# Altium PCB 100x100.PcbDoc
Units mm, origin at the board's own origin, x right, y up, seen from the top; angles counter-clockwise.
Board outline 100 x 100 mm, 2 copper layers (Top Layer, Bottom Layer); 65 components, 37 nets, 201 pads, 79 vias.
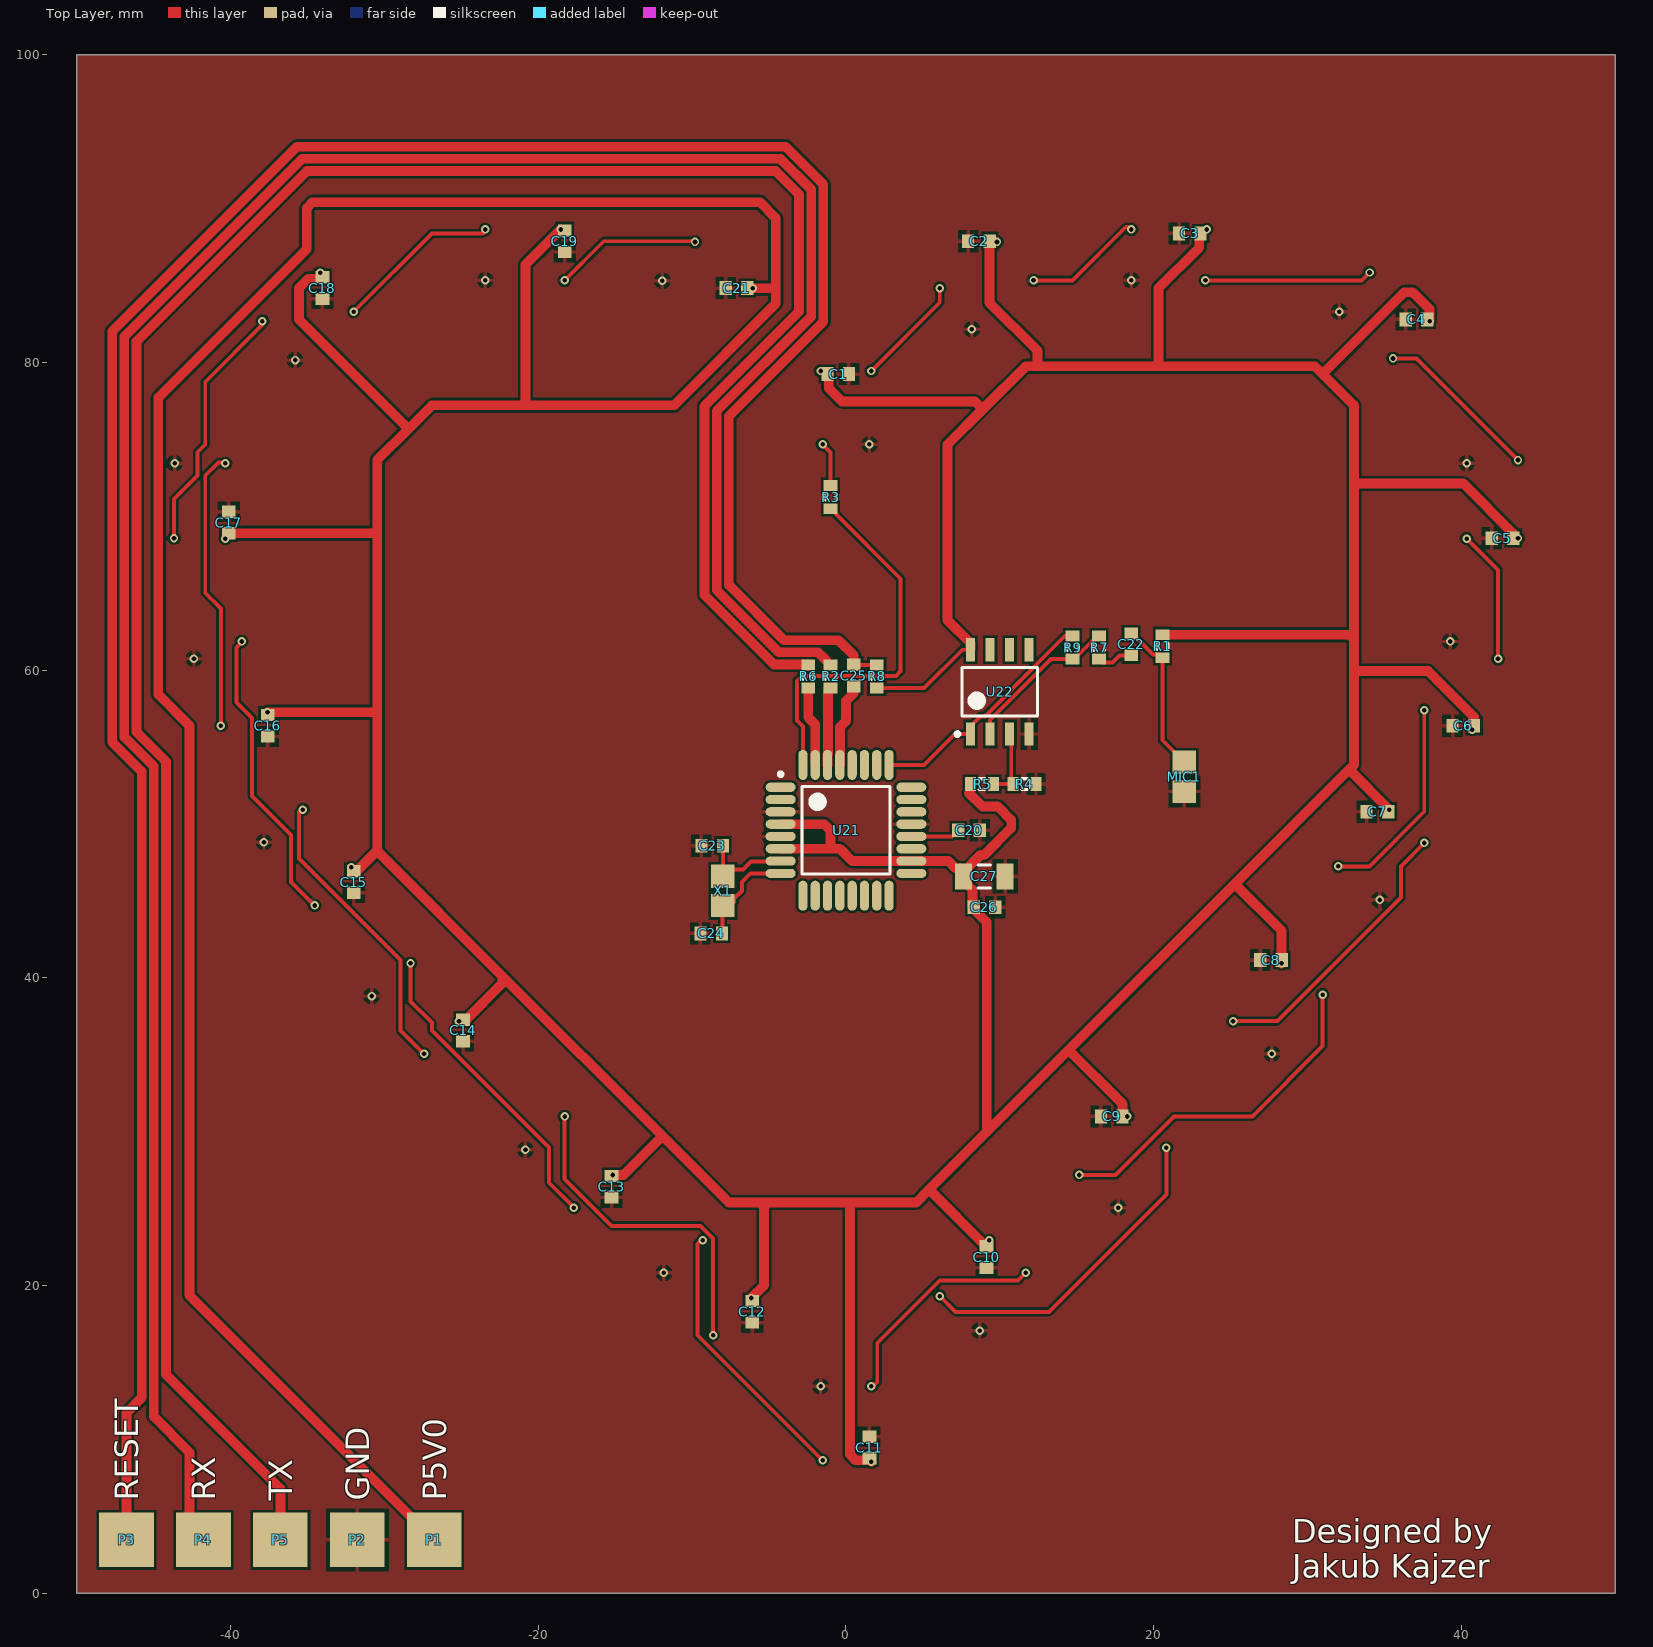
[diagram p0: Top Layer view]
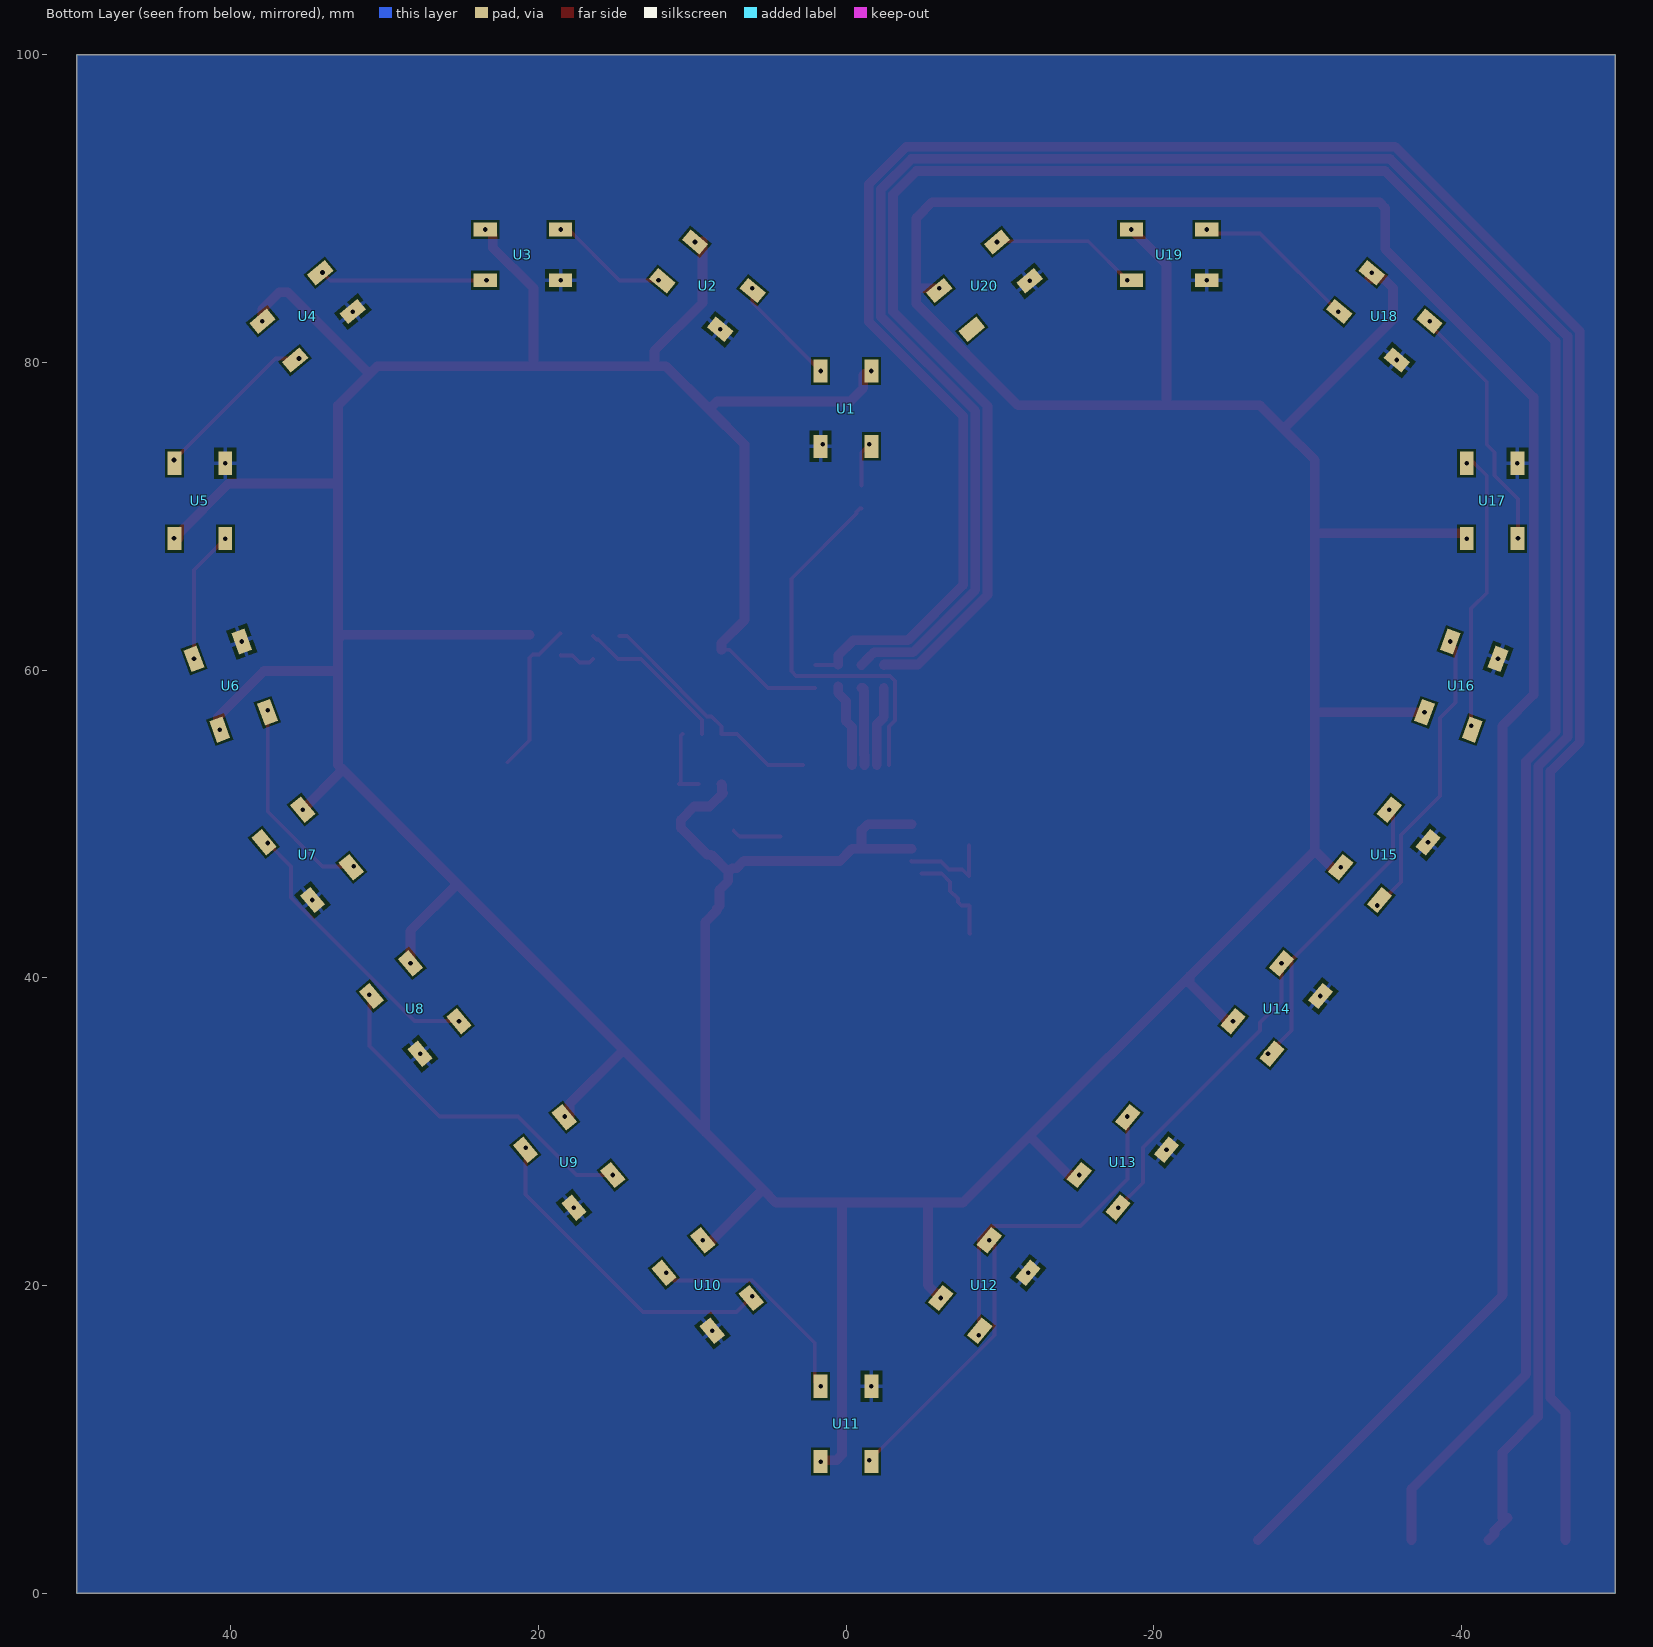
[diagram p1: Bottom Layer view, seen from below]
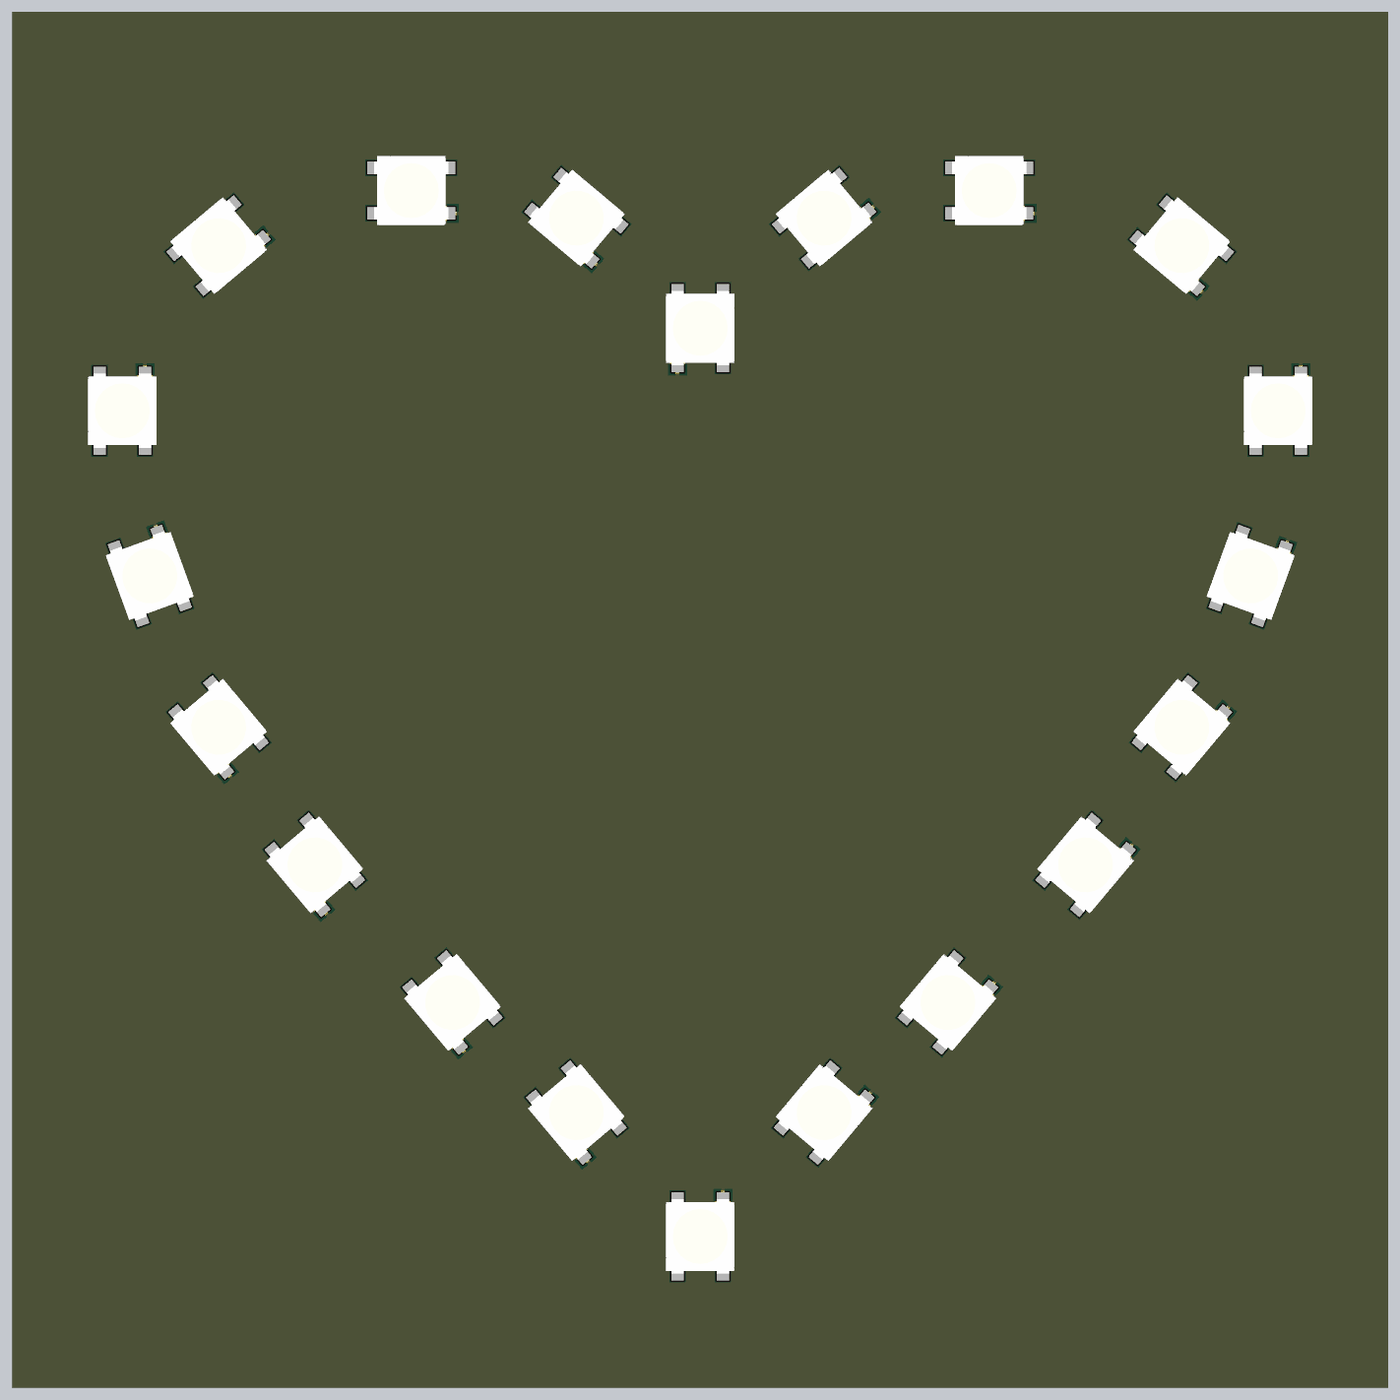
[diagram p2: 3D render of the assembled board from below, using the file's embedded part models]

## Layer stack, top to bottom
Top Solder: solder mask 0.0102, Solder Resist, Dk 3.5
Top Layer: signal copper 0.0356
Dielectric 1: dielectric 0.32, FR-4, Dk 4.8
Bottom Layer: signal copper 0.0356
Bottom Solder: solder mask 0.0102, Solder Resist, Dk 3.5

## Board outline
-50,0 -50,100 50,100 50,0

## Design rules (kind name [scope] priority, off if disabled: settings)
Clearance [All] p1: gap=0.152 ignorepadtopadclearanceinfootprint=FALSE except(0: Arc-Hole Track-Hole SMDPad-Hole THPad-Hole Via-Hole Fill-Hole Poly-Hole Region-Hole Text-Hole)
PolygonConnect [All] p1: connectstyle=Relief reliefconductorwidth=0.254 reliefentries=4 polygonreliefangle="90 Angle" airgapwidth=0.254
RoutingVias [All] p1: holewidth=0.3 width=0.55 viastyle="Through Hole" minholewidth=0.3 minwidth=0.55 maxholewidth=0.3 maxwidth=0.55
SolderMaskExpansion [All] p1: expansion=0.102
Width [All] p1: maxlimit=0.635 minlimit=0.152 preferedwidth=0.254 minimp=50.000000 maximp=50.000000 favimp=50.000000
30 further rules are at their usual default settings.

## Components (designator, comment, footprint, x,y, rotation, side; value= is the part's Value field where it differs from the comment)
C1 "Cap Semi" 1608[0603] -0.508,79.248 r180 top value=100nF
C2 "Cap Semi" 1608[0603] 8.636,87.884 r0 top value=100nF
C3 "Cap Semi" 1608[0603] 22.352,88.392 r0 top value=100nF
C4 "Cap Semi" 1608[0603] 37.084,82.804 r0 top value=100nF
C5 "Cap Semi" 1608[0603] 42.672,68.58 r0 top value=100nF
C6 "Cap Semi" 1608[0603] 40.132,56.388 r0 top value=100nF
C7 "Cap Semi" 1608[0603] 34.544,50.8 r0 top value=100nF
C8 "Cap Semi" 1608[0603] 27.624,41.148 r0 top value=100nF
C9 "Cap Semi" 1608[0603] 17.272,30.988 r0 top value=100nF
C10 "Cap Semi" 1608[0603] 9.144,21.844 r90 top value=100nF
C11 "Cap Semi" 1608[0603] 1.524,9.46 r270 top value=100nF
C12 "Cap Semi" 1608[0603] -6.096,18.288 r90 top value=100nF
C13 "Cap Semi" 1608[0603] -15.24,26.416 r90 top value=100nF
C14 "Cap Semi" 1608[0603] -24.892,36.576 r90 top value=100nF
C15 "Cap Semi" 1608[0603] -32.004,46.228 r90 top value=100nF
C16 "Cap Semi" 1608[0603] -37.592,56.388 r90 top value=100nF
C17 "Cap Semi" 1608[0603] -40.132,69.596 r270 top value=100nF
C18 "Cap Semi" 1608[0603] -34.036,84.836 r90 top value=100nF
C19 "Cap Semi" 1608[0603] -18.288,87.884 r90 top value=100nF
C20 "Cap Semi" 1608[0603] 8,49.59 r180 top value=0.1u
C21 "Cap Semi" 1608[0603] -7.112,84.836 r0 top value=100nF
C22 "Cap Semi" 1608[0603] 18.542,61.684 r90 top value=1uF
C23 "Cap Semi" 1608[0603] -8.7,48.59 r0 top value=12p
C24 "Cap Semi" 1608[0603] -8.763,42.888 r0 top value=12p
C25 "Cap Semi" 1608[0603] 0.508,59.652 r270 top value=100n
C26 "Cap Semi" 1608[0603] 9,44.59 r180 top value=1uF
C27 "Cap Semi" C1206 9,46.59 r0 top value=100nF
MIC1 "MIC" MIC 22,53 r0 top
P1 "PAD" PAD -26.77,3.46 r0 top
P2 "PAD" PAD -31.77,3.46 r0 top
P3 "PAD" PAD -46.77,3.46 r0 top
P4 "PAD" PAD -41.77,3.46 r0 top
P5 "PAD" PAD -36.77,3.46 r0 top
R1 "Res3" J1-0603 20.574,61.557 r90 top value=10K
R2 "Res3" J1-0603 -1,59.59 r90 top value=1K
R3 "Res3" J1-0603 -1,71.25 r90 top value=560
R4 "Res3" J1-0603 11.6,52.59 r0 top value=10K
R5 "Res3" J1-0603 8.846,52.59 r180 top value=10K
R6 "Res3" J1-0603 -2.454,59.59 r90 top value=1K
R7 "Res3" J1-0603 16.454,61.468 r90 top value=1K
R8 "Res3" J1-0603 2,59.59 r270 top value=1K
R9 "Res3" J1-0603 14.732,61.468 r90 top value=100k
U1 "WS2812B" ADAI-WS2812B_V 0,77 r270 bottom
U2 "WS2812B" ADAI-WS2812B_V 9,85 r220 bottom
U3 "WS2812B" ADAI-WS2812B_V 21,87 r180 bottom
U4 "WS2812B" ADAI-WS2812B_V 35,83 r140 bottom
U5 "WS2812B" ADAI-WS2812B_V 42,71 r90 bottom
U6 "WS2812B" ADAI-WS2812B_V 40,59 r70 bottom
U7 "WS2812B" ADAI-WS2812B_V 35,48 r230 bottom
U8 "WS2812B" ADAI-WS2812B_V 28,38 r230 bottom
U9 "WS2812B" ADAI-WS2812B_V 18,28 r230 bottom
U10 "WS2812B" ADAI-WS2812B_V 9,20 r230 bottom
U11 "WS2812B" ADAI-WS2812B_V 0,11 r90 bottom
U12 "WS2812B" ADAI-WS2812B_V -9,20 r130 bottom
U13 "WS2812B" ADAI-WS2812B_V -18,28 r130 bottom
U14 "WS2812B" ADAI-WS2812B_V -28,38 r130 bottom
U15 "WS2812B" ADAI-WS2812B_V -35,48 r130 bottom
U16 "WS2812B" ADAI-WS2812B_V -40,59 r110 bottom
U17 "WS2812B" ADAI-WS2812B_V -42,71 r90 bottom
U18 "WS2812B" ADAI-WS2812B_V -35,83 r220 bottom
U19 "WS2812B" ADAI-WS2812B_V -21,87 r180 bottom
U20 "WS2812B" ADAI-WS2812B_V -9,85 r140 bottom
U21 "ATmega328P-15AZ" 32MA_M 0,49.59 r0 top
U22 "LM833DR2" ONSC-SOIC-8-751-07_V 10,58.59 r90 top
X1 "KWARC" MIC -8,45.59 r0 top

## Footprints (in the part's own frame and the unit in brackets; to place one, negate y for a bottom-side part, rotate by r counter-clockwise, add the part's x,y. Pads: shape width x height; smd on the part's side, far side on the other; paste and mask are expansions set on the pad)
32MA_M [mm] "Thin QFP, 32-Leads, Body 7x7mm, Pitch 0.8mm, IPC Low Density"
  oval 1.95x0.6 smd: 1(-4.25,2.8) 2(-4.25,2) 3(-4.25,1.2) 4(-4.25,0.4) 5(-4.25,-0.4) 6(-4.25,-1.2) 7(-4.25,-2) 8(-4.25,-2.8) 17(4.25,-2.8) 18(4.25,-2) 19(4.25,-1.2) 20(4.25,-0.4) 21(4.25,0.4) 22(4.25,1.2) 23(4.25,2) 24(4.25,2.8)
  oval 0.6x1.95 smd: 9(-2.8,-4.25) 10(-2,-4.25) 11(-1.2,-4.25) 12(-0.4,-4.25) 13(0.4,-4.25) 14(1.2,-4.25) 15(2,-4.25) 16(2.8,-4.25) 25(2.8,4.25) 26(2,4.25) 27(1.2,4.25) 28(0.4,4.25) 29(-0.4,4.25) 30(-1.2,4.25) 31(-2,4.25) 32(-2.8,4.25)
  silkscreen extent -4.37,-2.85 2.85,3.77, body extent -3.5,-3.5 3.5,3.5, height 1.2
1608[0603] [mm] "Chip Capacitor, Body 1.6x0.8mm, IPC High Density"
  rect 0.8x0.9 smd: 1(-0.7,0) 2(0.7,0)
  body extent -0.87,-0.48 0.87,0.48, height 1.3
ADAI-WS2812B_V [mm] "SMD, 4-Leads, Body 5x5mm, Pitch 3.3mm"
  rect 1.5x0.9 smd: 1(-2.45,1.65) 2(-2.45,-1.65) 3(2.45,-1.65) 4(2.45,1.65)
  body extent -2.7,-2.5 2.7,2.5, height 1.69
C1206 [mm] "Chip Capacitor, Body 3.2x1.6mm, IPC High Density"
  rect 1.1x1.7 smd: 1(-1.35,0) 2(1.35,0)
  silkscreen extent -0.4,-0.75 0.4,0.75, body extent -1.7,-0.9 1.7,0.9, height 1.3
J1-0603 [mm] "Chip Resistor, Body 1.6x0.8mm, IPC High Density"
  rect 0.7x0.9 smd: 1(-0.75,0) 2(0.75,0)
  silkscreen extent -0.2,-0.35 0.2,0.35, body extent -0.85,-0.48 0.85,0.48, height 0.9
MIC [mil]
  rect 60x60 smd: 1(0,40) 2(0,-35)
ONSC-SOIC-8-751-07_V [mm] "SOIC, 8-Leads, Body 4.9x3.9mm, Pitch 1.27mm"
  rect 1.52x0.6 smd: 1(-2.74,1.905) 2(-2.74,0.635) 3(-2.74,-0.635) 4(-2.74,-1.905) 5(2.74,-1.905) 6(2.74,-0.635) 7(2.74,0.635) 8(2.74,1.905)
  silkscreen extent -2.86,-2.45 1.58,2.88, body extent -1.95,-2.45 1.95,2.45, height 1.75
PAD [mil]
  rect 140x140 smd: 1(0,0)

## Part data
C1 C2 C3 C4 C5 C6 C7 C8 C9 C10 C11 C12 C13 C14 C15 C16 C17 C18 C19 C20 C21 C22 C23 C24 C25 C26 C27: "Capacitor (Semiconductor SIM Model)", LatestRevisionDate=29-May-2009, LatestRevisionNote="IPC-7351 Footprint Added.", PackageDescription="Chip Capacitor", PackageReference=C1206, Published=8-Jun-2000, Publisher="Altium Limited"
R1 R2 R3 R4 R5 R6 R7 R8 R9: "Resistor", LatestRevisionDate=29-May-2009, LatestRevisionNote="IPC-7351 Footprint Added.", PackageDescription="Chip Resistor", PackageReference=J1-0603, Published=8-Jun-2000, Publisher="Altium Limited"
U1 U2 U3 U4 U5 U6 U7 U8 U9 U10 U11 U12 U13 U14 U15 U16 U17 U18 U19 U20: library part CMP-1740-00005-1, "Intelligent Control LED Integrated Light Source, 3.5 to 5.3 V, -25 to 80 degC, 4-Pin SMD, RoHS, Bulk", Case\Package=Radial, Current Rating="240 mA", Max Operating Temperature="125 degC", Min Operating Temperature="-55 degC", Package Quantity=200, Tolerance=10%, ComponentLink1Description="Manufacturer URL", ComponentLink1URL=https://www.adafruit.com/, ComponentLink2Description=Datasheet, ComponentLink2URL=https://cdn-shop.adafruit.com/datasheets/WS2812B.pdf, DatasheetVersion=May-13, Height="12.2 mm", Lead Pitch="5 mm", Length="12.2 mm", Mount="Through Hole", PackageDescription="4-Pin Surface Mount Device, Body 5 x 5 mm, Pitch 3.3 mm", PackageReference=WS2812B, Packaging=Bulk, Pins=2, Radiation Hardening=No, REACH SVHC="No SVHC", RoHSCompliant=true, Shielding=Unshielded
U21: library part CMP-0096-00111-2, "8-bit Automotive AVR Microcontroller, 32KB Flash, 1KB EEPROM, 2KB SRAM, 23 GPIO pins, Automotive Grade (-40°C to +125°C), 32-Pin TQFP", ComponentLink1Description="Manufacturer URL", ComponentLink1URL=http://www.atmel.com/, ComponentLink2Description="ATmega328P Datasheet", ComponentLink2URL=http://www.atmel.com/dyn/resources/prod_documents/doc7810.pdf, DatasheetVersion="revA, Nov-2009", PackageDescription="32-Lead Thin Profile Plastic Quad Flatpack (TQFP) - 7x7x1mm Body,  0.8 mm Pitch", PackageReference=32MA, PackageVersion="revB, Jul-2007", RevisionNote="URLs added"
U22: library part CMP-1310-00280-1, "Low Noise, Audio Dual Operational Amplifier, -40 to 85 degC, 8-Pin SOIC, Tape and Reel", Manufacturer="On Semiconductor", ComponentLink1Description="Manufacturer URL", ComponentLink1URL=http://www.onsemi.com/, ComponentLink2Description=Datasheet, ComponentLink2URL=http://www.onsemi.cn/pub_link/Collateral/LM833-D.PDF, ComponentLink3Description="Package Specification", ComponentLink3URL=http://www.onsemi.com/pub_link/Collateral/751-07.PDF, DatasheetVersion="Rev. 6", GBW Typ (MHz)=15, Mounting Technology="Surface Mount", PackageDescription="8-Pin Small Outline Integrated Circuit, Body 4.9 x 3.9 mm, Pitch 1.27 mm", PackageReference=SOIC-8-751-07, PackageVersion="Rev. AK, 02/2011", Packing="Tape and Reel", PartNumber=LM833DR2, RoHS=FALSE, SR Typ (V/uS)=7

## Via types
v1: diameter 0.55, hole 0.3, Top Layer to Bottom Layer, tented both sides, 79 vias

## Nets (pads, with @x,y where several pads share a name; then routed paths per layer and width w, separated by ;. In a path a pad name is that pad's centre, name@x,y a point inside that pad or via, vN(x,y) a via of type N, cw(c..) or ccw(c..) an arc to the next point about the centre after c; other vN are vias at no path point)
+5: C1.2 C2.2 C3.2 C4.2 C5.2 C6.2 C7.2 C8.2 C9.2 C10.2 C11.2 C12.2 C13.2 C14.2 C15.2 C16.2 C17.2 C18.2 C19.2 C21.2 C26.2 C27.1 P1.1 R1.2 R5.2 R8.2 U1.1 U2.1 U3.1 U4.1 U5.1 U6.1 U7.1 U8.1 U9.1 U10.1 U11.1 U12.1 U13.1 U14.1 U15.1 U16.1 U17.1 U18.1 U19.1 U20.1 U21.4 U21.6 U21.18 U22.8 | length 569
  Top Layer w0.254: C21.2 v1(-6.063,84.836) ; R8.2 5.08,58.84 7.57,61.33 U22.8
  Top Layer w0.635: C17.2 -30.672,68.896 -30.48,69.088 ; v1(-37.612,57.262) -30.622,57.262 -30.48,57.404 ; C18.2 -34.119,85.453 -34.943,85.453 -35.56,84.836 -35.56,82.804 -28.448,75.692 ; C15.2 -31.812,46.928 -30.48,48.26 ; P1.1 -42.672,19.362 -42.672,56.388 -44.704,58.42 -44.704,77.724 -35.052,87.376 -35.052,90.052 -34.68,90.424 -5.588,90.424 -4.572,89.408 -4.572,84.836 ; C14.2 -24.7,37.276 -22.352,39.624 -22.352,40.132 ; v1(-18.55,88.65) -20.828,86.372 -20.828,77.216 ; v1(-15.161,27.184) -14.472,27.184 -11.938,29.718 ; v1(-6.161,19.184) -5.334,20.011 -5.334,25.4 ; v1(-6.063,84.836) -4.572,84.836 ; U21.6 -1.016,48.39 ; U21.4 -1.418,49.99 -1.016,49.588 -1.016,48.39 ; C1.2 -1.125,79.165 -1.125,78.341 -0.254,77.47 8.382,77.47 8.89,76.962 ; v1(1.65,8.55) 1.564,8.636 0.626,8.636 0.254,9.008 0.254,25.4 ; U22.8 8.095,61.755 6.604,63.246 6.604,74.676 8.89,76.962 ; R5.2 8.063,52.557 8.063,52.063 8,52 8.868,51.132 9.868,51.132 10.737,50.263 10.737,49.737 9,48 8.76,48 C27.1@7.65,46.89 ; C10.2 9.094,22.544 5.476,26.162 5.334,26.162 ; C2.2 9.336,83.882 12.446,80.772 12.446,79.756 ; C9.2 17.972,31.812 14.478,35.306 ; R1.2 32.713,62.307 33.02,62 ; C3.2 22.969,88.31 22.969,87.485 20.32,84.836 20.32,79.756 ; v1(28.311,40.937) 28.311,43.063 25.273,46.101 ; v1(35.311,50.937) 32.781,53.467 32.639,53.467 ; v1(37.937,82.689) 37.937,83.475 36.839,84.573 36.313,84.573 30.988,79.248 ; C6.2 40.832,56.958 37.846,59.944 33.02,59.944 ; C5.2 43.372,68.896 40.132,72.136 33.02,72.136 ; -30.48,48.26 -22.352,40.132 ; -30.48,48.26 -30.48,57.404 ; -30.48,57.404 -30.48,69.088 ; -30.48,69.088 -30.48,73.66 -28.448,75.692 ; -28.448,75.692 -26.924,77.216 -20.828,77.216 ; -22.352,40.132 -11.938,29.718 ; -20.828,77.216 -11.176,77.216 -4.572,83.82 -4.572,84.836 ; -11.938,29.718 -7.62,25.4 -5.334,25.4 ; -5.334,25.4 0.254,25.4 ; -1.016,48.39 -0.4,48.39 0.4,47.59 U21.18 6.65,47.59 7.117,47.122 7.417,47.122 C27.1@7.65,46.89 ; 0.254,25.4 4.572,25.4 5.334,26.162 ; 5.334,26.162 9.144,29.972 ; C27.1@7.65,46.89 C27.1 7.65,46.29 8.217,45.723 8.217,44.672 C26.2 8.383,44.507 8.383,44.393 9.144,43.631 9.144,29.972 ; 8.89,76.962 11.684,79.756 12.446,79.756 ; 9.144,29.972 14.478,35.306 ; 12.446,79.756 20.32,79.756 ; 14.478,35.306 25.273,46.101 ; 20.32,79.756 30.48,79.756 30.988,79.248 ; 25.273,46.101 32.639,53.467 ; 30.988,79.248 33.02,77.216 33.02,72.136 ; 32.639,53.467 33.02,53.848 33.02,59.944 ; 33.02,59.944 33.02,62 ; 33.02,62 33.02,72.136
  other v1: 9.311,22.937 18.288,30.988 -25.161,37.184 -32.161,47.184 40.713,56.133 -40.35,68.55 43.688,68.58 -1.65,79.45 -34.184,85.839 9.816,87.839 23.45,88.65
ADC: R9.2 U21.25 U22.1 | length 15.7
  Top Layer w0.254: U21.25 5.072,53.84 7.082,55.85 U22.1 8.095,56.355 8.74,57 9.03,57 12.484,60.454 12.484,60.484 14.218,62.218 R9.2
GND: C1.1 C2.1 C3.1 C4.1 C5.1 C6.1 C7.1 C8.1 C9.1 C10.1 C11.1 C12.1 C13.1 C14.1 C15.1 C16.1 C17.1 C18.1 C19.1 C20.1 C21.1 C23.1 C24.1 C26.1 C27.2 MIC1.2 P2.1 R4.2 U1.3 U2.3 U3.3 U4.3 U5.3 U6.3 U7.3 U8.3 U9.3 U10.3 U11.3 U12.3 U13.3 U14.3 U15.3 U16.3 U17.3 U18.3 U19.3 U20.3 U21.3 U21.5 U21.21 U22.4 | length 0.2
  Bottom Layer w0.254: v1(1.524,74.676) U1.3
  other v1: -1.65,13.45 8.689,17.063 -11.839,20.816 17.689,25.063 -20.839,28.816 27.689,35.063 -30.839,38.816 34.689,45.063 -37.839,48.816 -42.388,60.738 39.287,61.867 -43.65,73.45 40.35,73.45 -35.816,80.161 8.184,82.161 32.063,83.311 -11.937,85.311 -23.45,85.35 18.55,85.35
LED_DATA: R3.2 U1.4 | length 2.9
  Top Layer w0.254: v1(-1.524,74.676) -1,74.152 R3.2
NetC20_2: C20.2 U21.20 | length 3.2
  Top Layer w0.254: U21.20 6.9,49.19 6.977,49.267 7.027,49.267 7.3,49.54 C20.2
NetC22_1: C22.1 R7.1 | length 2.4
  Top Layer w0.254: R7.1 16.677,60.495 17.315,60.495 17.78,60.96 18.518,60.96 C22.1
NetC22_2: C22.2 MIC1.1 R1.1 | length 10.1
  Top Layer w0.254: C22.2 18.592,62.384 19.946,61.03 20.351,61.03 R1.1 20.574,55.442 MIC1.1
NetC23_2: C23.2 U21.7 X1.1 | length 6.1
  Top Layer w0.254: C23.2 X1.1 -7.555,47.051 -6.7,47.051 -6.178,47.573 -4.267,47.573 U21.7
NetC24_2: C24.2 U21.8 X1.2 | length 6.3
  Top Layer w0.254: C24.2 -8.031,42.888 -8.031,44.67 X1.2 -7.491,44.701 -7.272,44.92 -7.272,45.146 -6.768,45.649 -6.768,46.232 -6.228,46.772 U21.8@-4.908,46.772
NetC25_2: C25.2 U21.29 | length 5.5
  Top Layer w0.635: U21.29 -0.382,53.858 -0.382,56.305 0,56.687 0,58 0.508,58.508 C25.2
NetR2_1: R2.1 U21.30 | length 5.1
  Top Layer w0.635: U21.30 -1.2,54.48 -1.17,54.51 -1.17,58.67 -1.133,58.708 -1.133,58.807 -1.1,58.84 R2.1
NetR3_1: R3.1 U21.32 | length 25.1
  Top Layer w0.254: U21.32 -2.8,56.35 -3.184,56.734 -3.184,59.306 -2.858,59.631 3.243,59.631 3.556,59.944 3.556,65.944 -0.677,70.177 -0.677,70.277 -0.9,70.5 R3.1
NetR4_1: R4.1 R5.1 U22.3 | length 4.6
  Top Layer w0.254: R5.1 R4.1 10.743,52.698 10.743,55.742 U22.3
NetR6_1: R6.1 U21.31 | length 5.2
  Top Layer w0.635: R6.1 -2.454,56.937 -2,56.483 U21.31
NetR7_2: R7.2 R9.1 U22.2 | length 10.3
  Top Layer w0.254: U22.2 9.365,56.76 13.323,60.718 R9.1 14.832,60.718 16.109,61.995 16.231,61.995 R7.2
NetU1_2: U1.2 U2.4 | length 7.2
  Top Layer w0.254: v1(1.65,79.45) 6.096,83.896 v1(6.096,84.836)
NetU2_2: U2.2 U3.4 | length 8.1
  Top Layer w0.254: v1(12.192,85.344) 14.732,85.344 18.189,88.801 18.319,88.801 18.47,88.65 v1(18.55,88.65)
  Bottom Layer w0.254: U2.2 12.159,85.311 v1(12.192,85.344)
NetU3_2: U3.2 U4.4 | length 11
  Top Layer w0.254: v1(23.368,85.344) 33.528,85.344 v1(34.036,85.852)
  Bottom Layer w0.254: v1(23.368,85.344) 23.374,85.35 U3.2
NetU4_2: U4.2 U5.4 | length 11.2
  Top Layer w0.254: v1(35.56,80.264) 37.084,80.264 v1(43.688,73.66)
  Bottom Layer w0.254: v1(35.56,80.264) 35.663,80.161 U4.2
NetU5_2: U5.2 U6.4 | length 8.7
  Top Layer w0.254: v1(40.35,68.55) 42.388,66.512 v1(42.388,60.738)
NetU6_2: U6.2 U7.4 | length 13.8
  Top Layer w0.254: v1(32.004,47.244) 34.036,47.244 37.592,50.8 v1(37.592,57.404)
  Bottom Layer w0.254: v1(37.592,57.404) 37.612,57.384 U6.2
NetU7_2: U7.2 U8.4 | length 18.7
  Top Layer w0.254: v1(25.161,37.184) 28.04,37.184 36.068,45.212 36.068,47.244 v1(37.592,48.768)
  Bottom Layer w0.254: v1(37.592,48.768) 37.64,48.816 U7.2
NetU8_2: U8.2 U9.4 | length 22.9
  Top Layer w0.254: v1(15.161,27.184) 17.532,27.184 21.336,30.988 26.416,30.988 30.988,35.56 v1(30.988,38.906)
  Bottom Layer w0.254: U8.2 30.839,38.757 v1(30.988,38.906)
NetU9_2: U9.2 U10.4 | length 21.5
  Top Layer w0.254: v1(6.096,19.304) 7.112,18.288 13.208,18.288 20.828,25.908 v1(20.828,28.956)
  Bottom Layer w0.254: v1(20.828,28.956) 20.839,28.945 U9.2
NetU10_2: U10.2 U11.4 | length 14.7
  Top Layer w0.254: v1(1.65,13.45) 1.766,13.45 2.032,13.716 2.032,16.256 6.096,20.32 11.176,20.32 v1(11.684,20.828)
  Bottom Layer w0.254: v1(11.684,20.828) 11.696,20.816 U10.2
NetU11_2: U11.2 U12.4 | length 18
  Top Layer w0.254: v1(-9.311,22.937) -9.391,22.937 -9.468,22.86 -9.503,22.86 -9.652,22.711 -9.652,16.764 v1(-1.524,8.636)
  Bottom Layer w0.254: U11.2 -1.61,8.55 v1(-1.524,8.636)
NetU12_2: U12.2 U13.4 | length 21.9
  Top Layer w0.254: v1(-18.288,30.988) -18.288,26.924 -15.24,23.876 -9.465,23.876 -8.636,23.047 v1(-8.636,16.764)
  Bottom Layer w0.254: U12.2 -8.689,16.817 v1(-8.636,16.764)
NetU13_2: U13.2 U14.4 | length 20.3
  Top Layer w0.254: v1(-28.311,40.937) -28.311,38.471 -26.924,37.084 -26.924,36.576 -19.304,28.956 -19.304,26.677 v1(-17.689,25.063)
NetU14_2: U14.2 U15.4 | length 19.7
  Top Layer w0.254: v1(-35.311,50.937) -35.391,50.937 -35.54,50.789 -35.56,50.789 -35.56,47.752 -28.956,41.148 -28.956,36.576 v1(-27.432,35.052)
  Bottom Layer w0.254: U14.2 -27.679,35.052 v1(-27.432,35.052)
NetU15_2: U15.2 U16.4 | length 19.8
  Top Layer w0.254: v1(-39.287,61.867) -39.287,61.805 -39.624,61.468 -39.624,57.912 -38.608,56.896 -38.608,51.816 -36.068,49.276 -36.068,46.228 v1(-34.544,44.704)
  Bottom Layer w0.254: U15.2 -34.689,44.849 v1(-34.544,44.704)
NetU16_2: U16.2 U17.4 | length 18.6
  Top Layer w0.254: v1(-40.64,56.388) -40.64,64.008 -41.656,65.024 -41.656,72.644 -40.793,73.507 -40.407,73.507 v1(-40.35,73.45)
  Bottom Layer w0.254: U16.2 -40.64,56.206 v1(-40.64,56.388)
NetU17_2: U17.2 U18.4 | length 16.5
  Top Layer w0.254: v1(-43.688,68.58) -43.688,71.12 -42.164,72.644 -42.164,74.168 -41.656,74.676 -41.656,78.74 -37.927,82.469 -37.927,82.679 v1(-37.937,82.689)
  Bottom Layer w0.254: v1(-43.688,68.58) -43.658,68.55 U17.2
NetU18_2: U18.2 U19.4 | length 10.9
  Top Layer w0.254: v1(-32.004,83.312) -26.924,88.392 -23.599,88.392 -23.599,88.421 -23.45,88.57 v1(-23.45,88.65)
  Bottom Layer w0.254: U18.2 v1(-32.004,83.312) v1(-32.004,83.312)
NetU19_2: U19.2 U20.4 | length 9.8
  Top Layer w0.254: v1(-18.288,85.344) -15.748,87.884 -9.861,87.884 v1(-9.816,87.839)
  Bottom Layer w0.254: U19.2 -18.544,85.344 v1(-18.288,85.344)
RESET: C25.1 P3.1 R8.1 | length 172.7
  Top Layer w0.254: C25.1 0.52,60.34 R8.1
  Top Layer w0.635: P3.1 -46.77,11.717 -45.787,12.7 -45.787,53.407 -47.705,55.325 -47.705,82.03 -35.704,94.031 -3.92,94.031 -1.473,91.584 -1.473,82.66 -7.62,76.513 -7.62,65.532 -4.035,61.947 -0.479,61.947 0.508,60.96 C25.1
RX: P4.1 R2.2 | length 169.1
  Top Layer w0.635: P4.1 -42.164,3.854 -42.164,4.064 -43,4.9 -42.672,4.9 -42.672,9.144 -45,11.472 -45,53.734 -46.918,55.651 -46.918,81.704 -35.378,93.243 -4.246,93.243 -2.261,91.258 -2.261,82.986 -8.407,76.839 -8.407,65.206 -4.361,61.16 -1.81,61.16 -1.534,60.885 -1.534,60.874 R2.2
TX: P5.1 R6.2 | length 167.3
  Top Layer w0.635: P5.1 -36.77,6.781 -44.213,14.224 -44.213,54.06 -46.13,55.978 -46.13,81.378 -35.052,92.456 -4.572,92.456 -3.048,90.932 -3.048,83.312 -9.195,77.165 -9.195,64.88 -4.688,60.373 -2.487,60.373 R6.2
pads on no net: U20.2 U21.1 U21.2 U21.9 U21.10 U21.11 U21.12 U21.13 U21.14 U21.15 U21.16 U21.17 U21.19 U21.22 U21.23 U21.24 U21.26 U21.27 U21.28 U22.5 U22.6 U22.7

## Polygon pours and split planes (outlines as drawn)
GND on Top Layer "GND_L01_P004" (solid, remove dead copper, pour order 4): -50,100 50,100 50,0 -50,0
GND on Bottom Layer "GND_L02_P000" (solid, remove dead copper, pour order 0): -50,100 50,100 50,0 -50,0

## Other copper
Top Layer:
  text "'.Layer_Name'" at -52.73,106.08 h10.16
Bottom Layer:
  text "'.Layer_Name'" at -52.73,106.08 h10.16

## Silkscreen, mask and mechanical layers (free items; w line width, h text height)
Top Overlay:
  text "'.Layer_Name'" at -52.73,106.08 h10.16
  text "RESET" at -46,6 h1.52 r90
  text "RX" at -41,6 h1.52 r90
  text "TX" at -36,6 h1.52 r90
  text "GND" at -31,6 h1.52 r90
  text "P5V0" at -26,6 h1.52 r90
  text "Designed by  / Jakub Kajzer" at 29,1 h1.52
Bottom Overlay:
  text "'.Layer_Name'" at -52.73,106.08 h10.16
Top Solder:
  text "'.Layer_Name'" at -52.73,106.08 h10.16
Bottom Solder:
  text "'.Layer_Name'" at -52.73,106.08 h10.16
PCB Outline:
  the board outline again, w0.254
  text "'.Layer_Name'" at -52.73,106.08 h10.16
PCB Dimensions:
  text "'.Layer_Name'" at -52.73,106.08 h10.16

## Dimensions
-50,0 to 50,0 on PCB Dimensions
-50,0 to -50,100 on PCB Dimensions